# EAGLE board LEDController-REV2-PCB (EAGLE 9.7.0), part 1 of 2
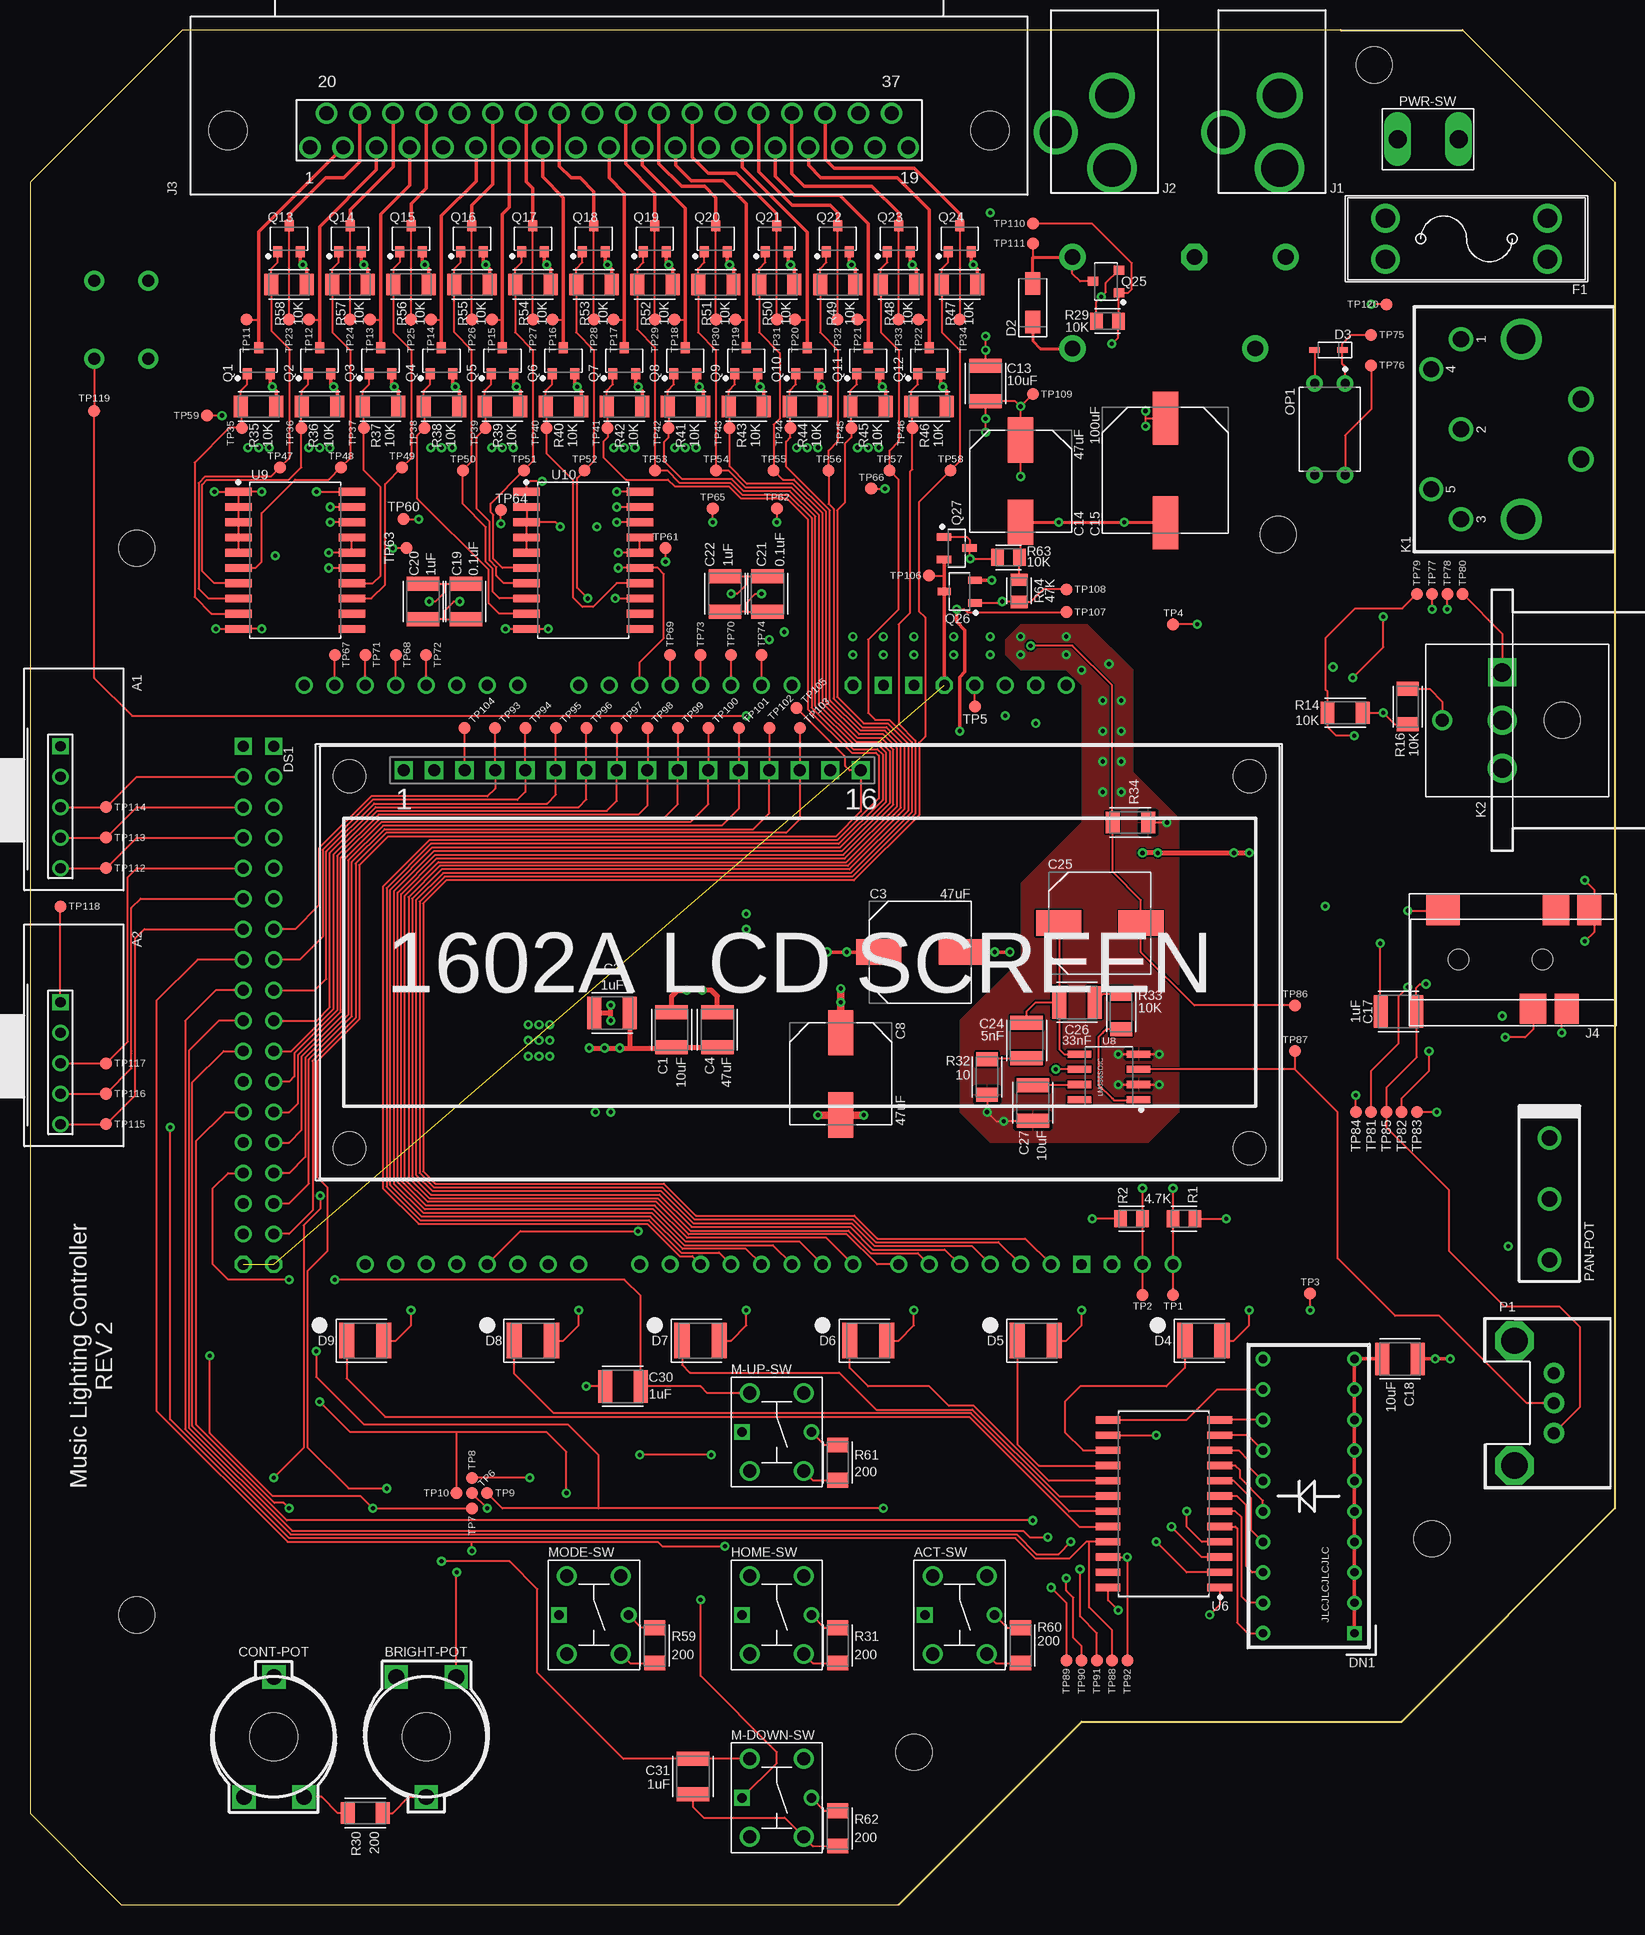
[diagram p0: board, top side]
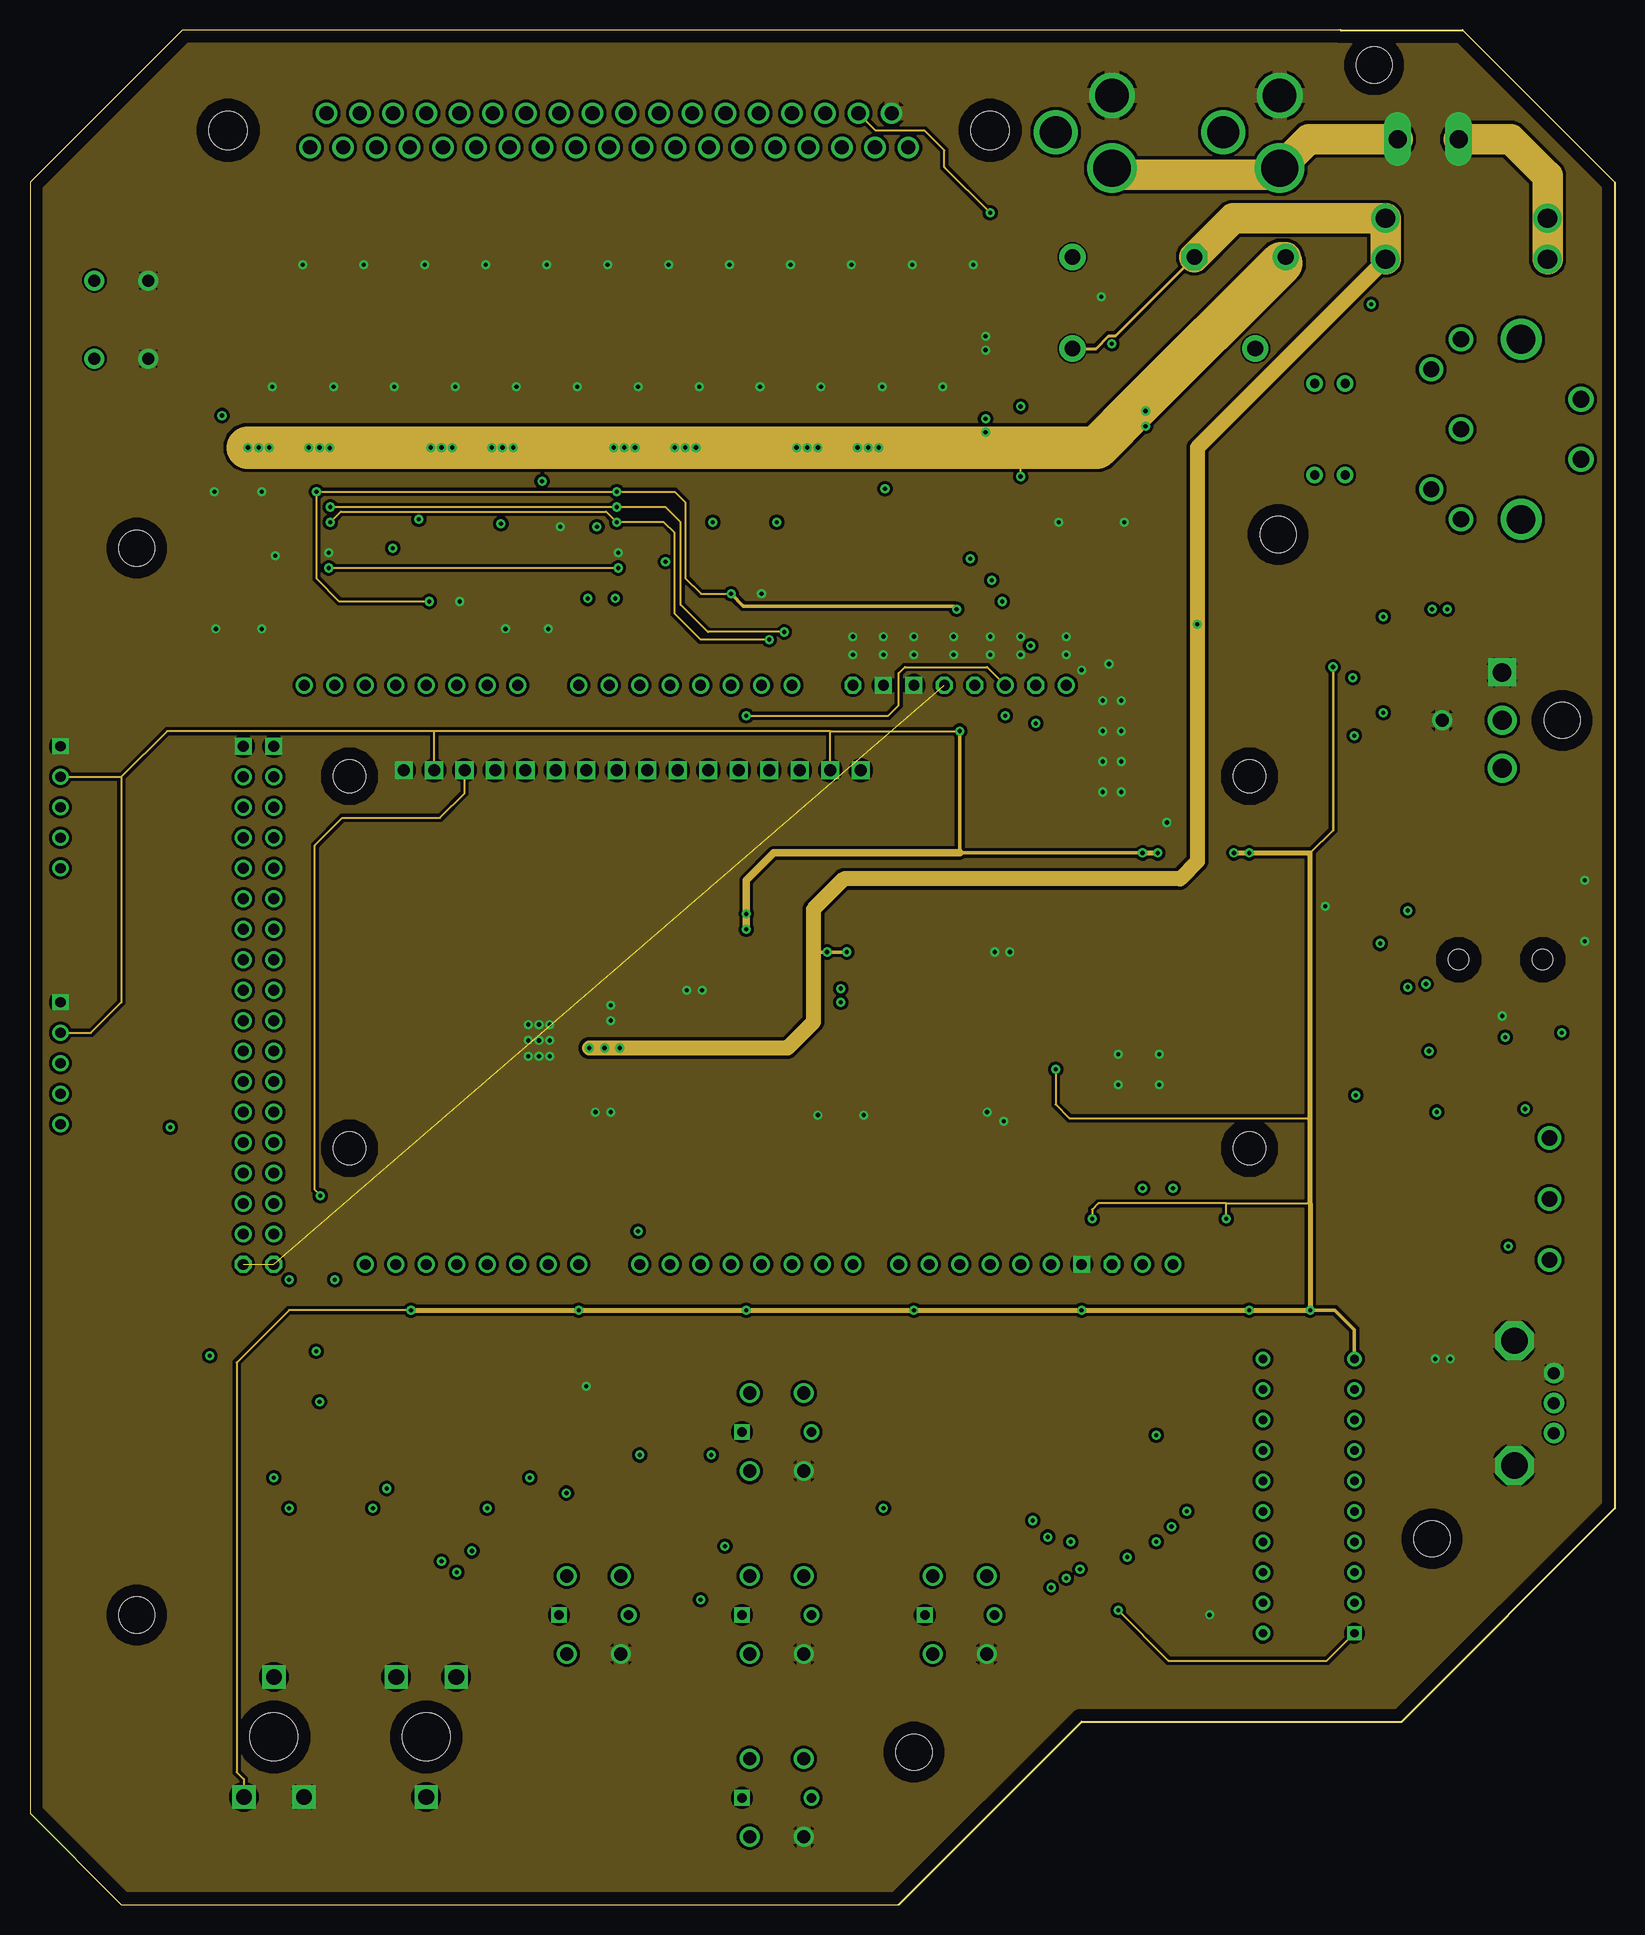
[diagram p1: board, inner layer PWR-PLANE]
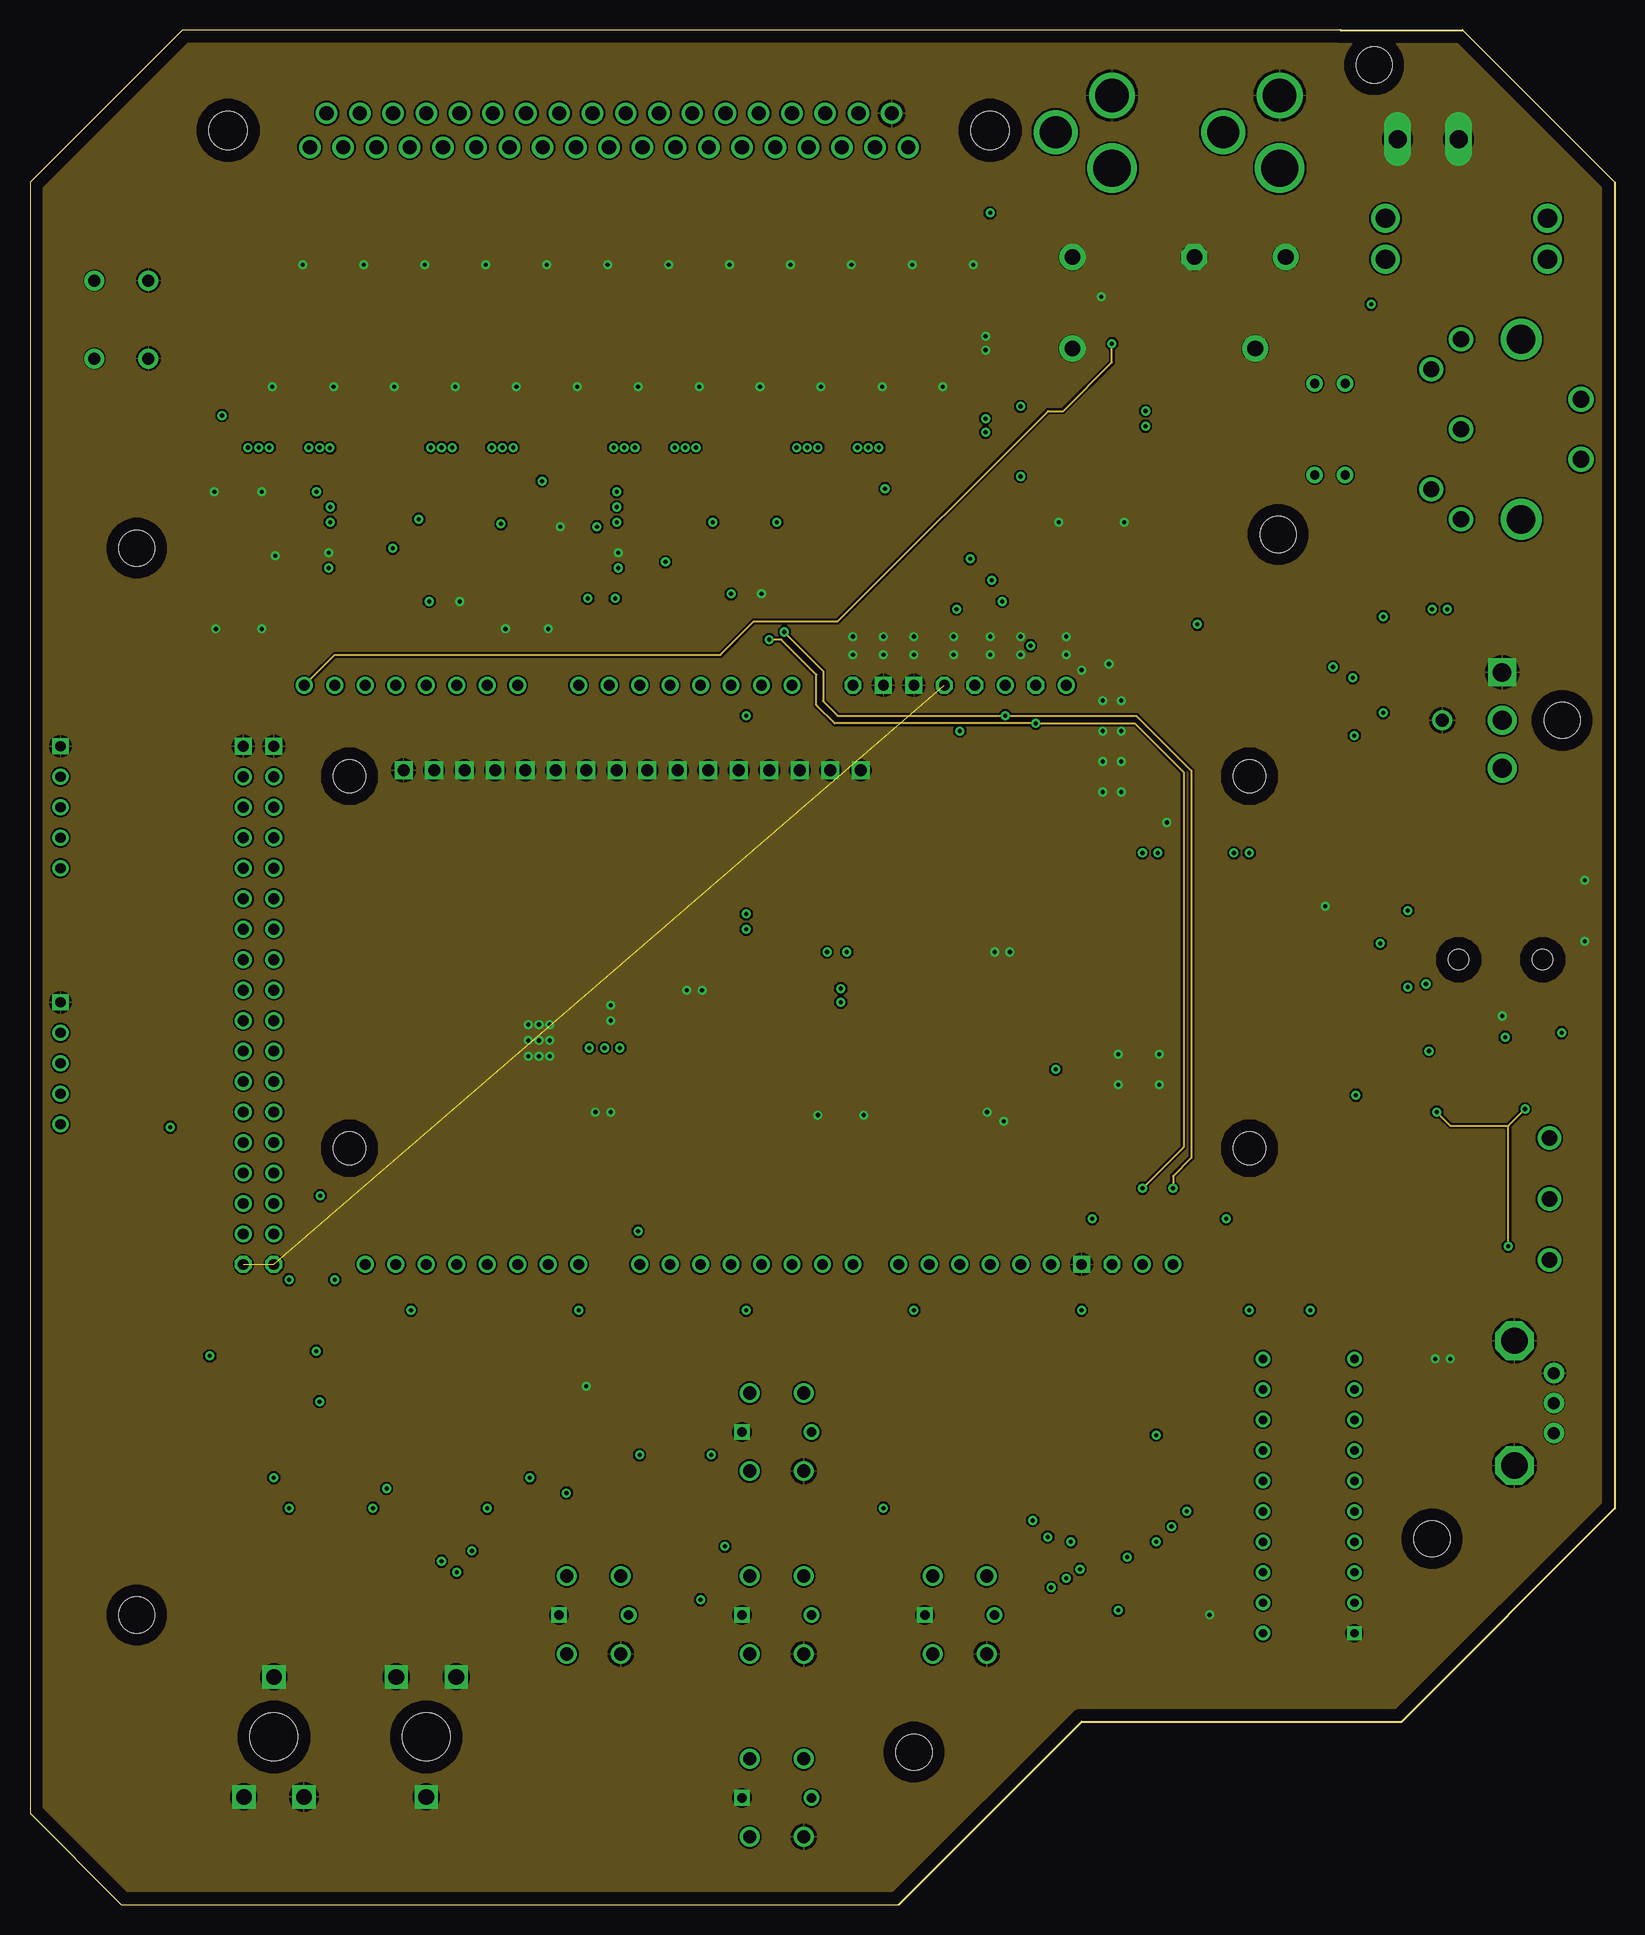
[diagram p2: board, inner layer GND-PLANE]
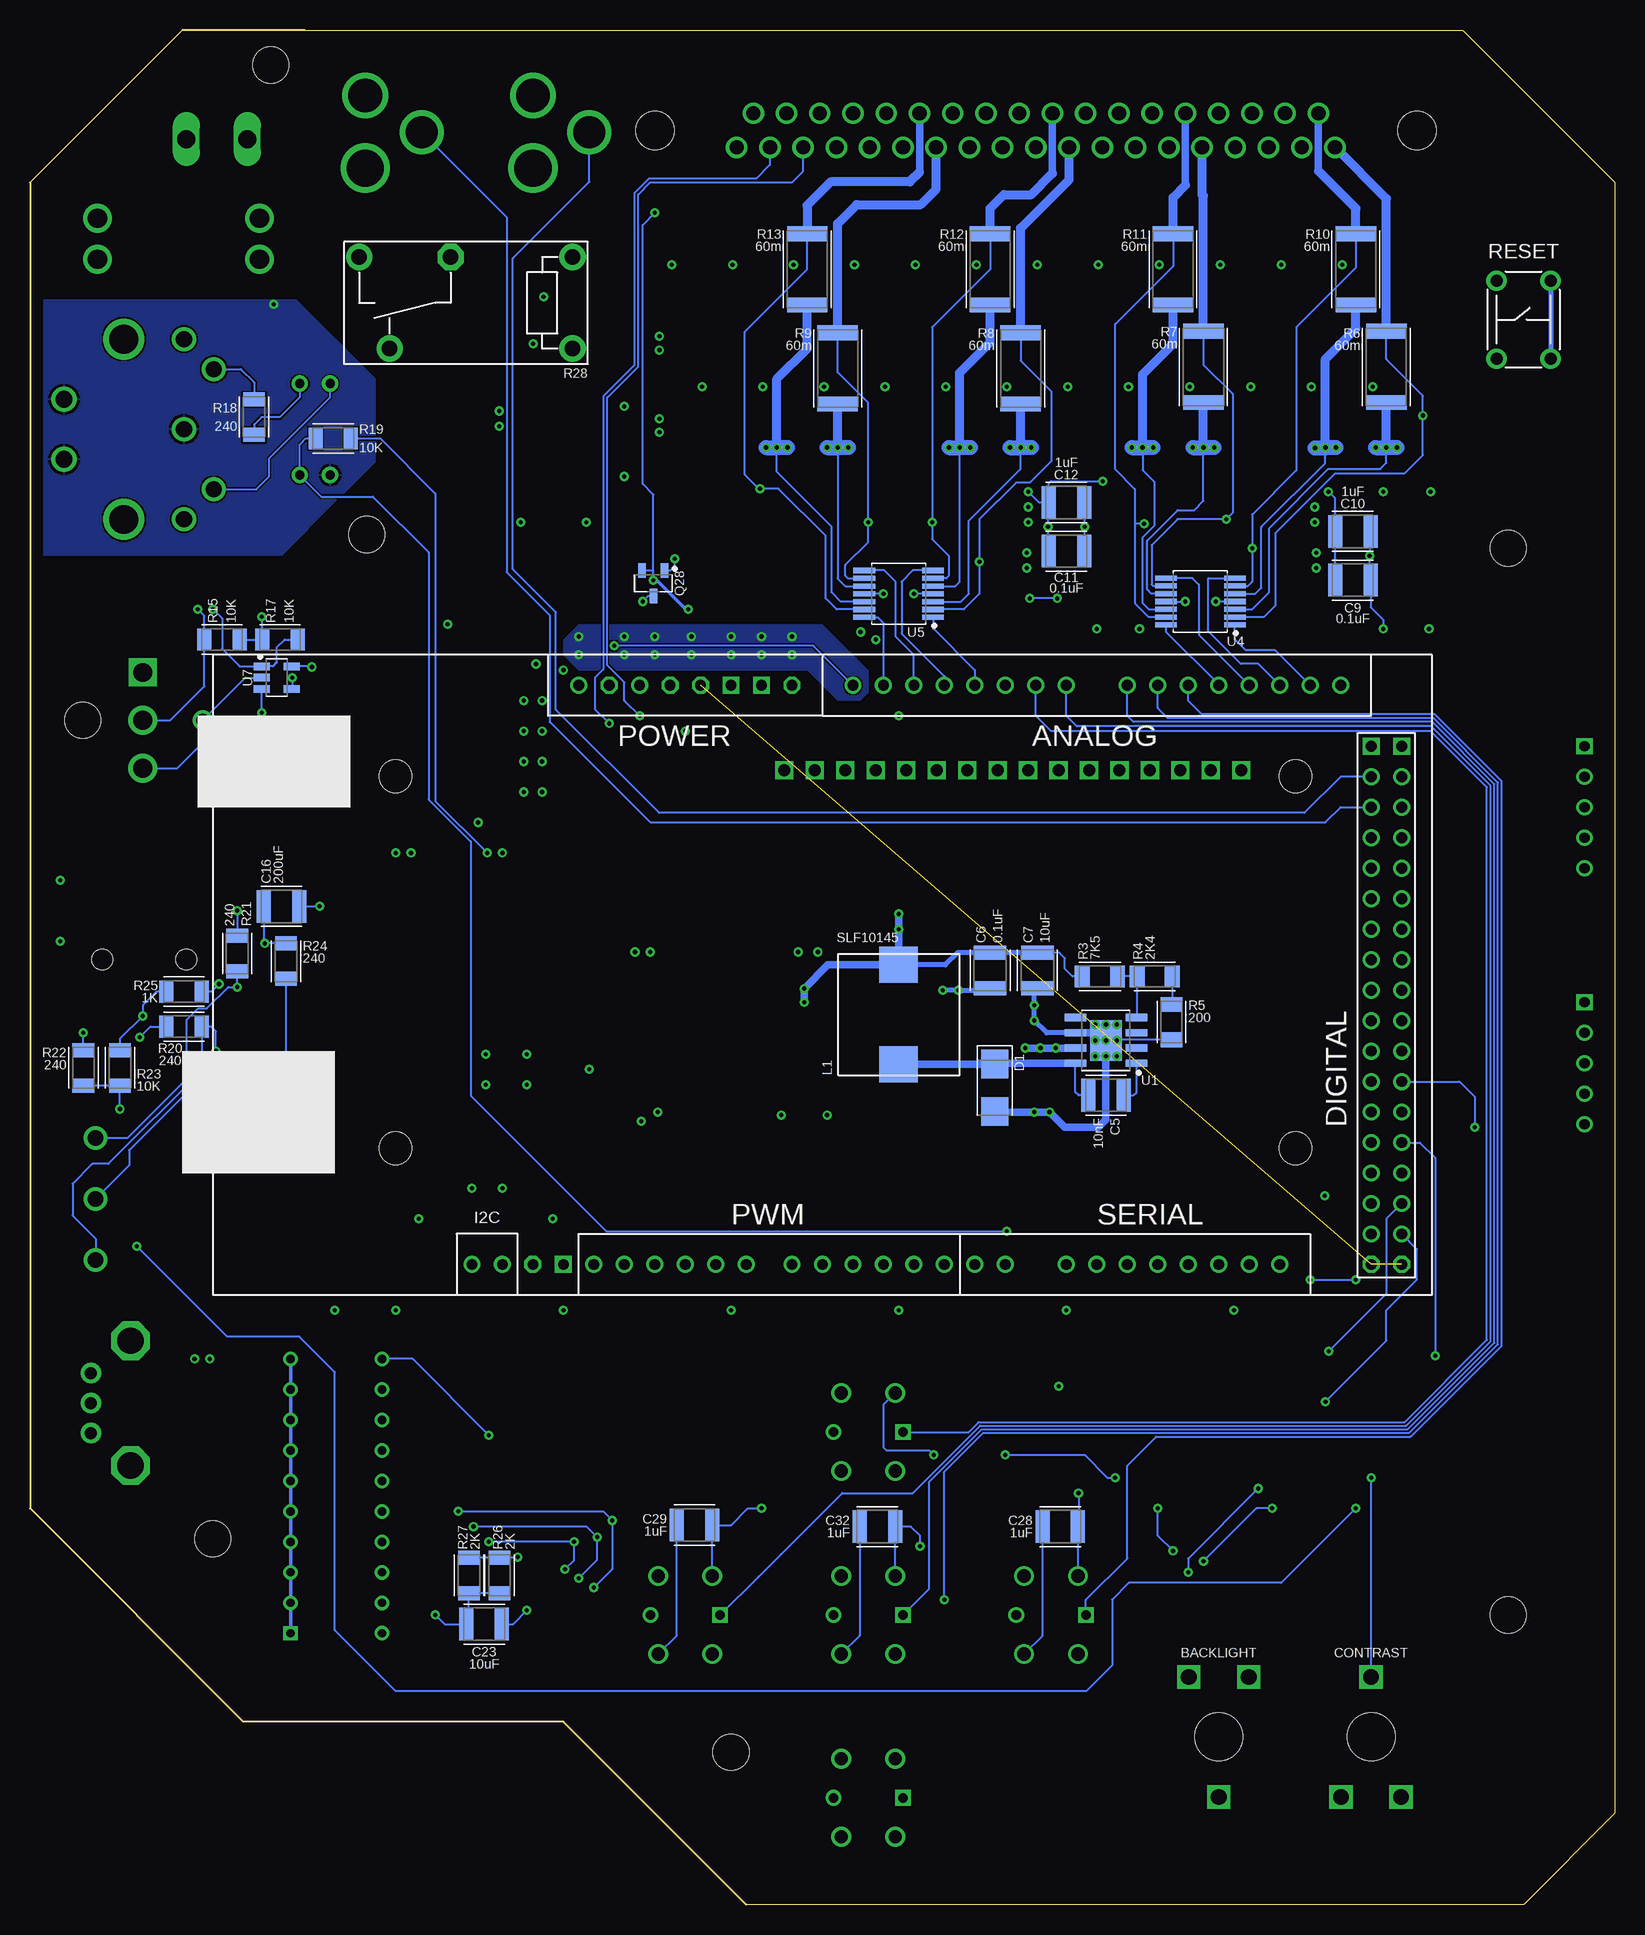
[diagram p3: board, bottom side, seen from below]

Size 132.08 x 156.21 mm. Coordinates in mm from the lower left corner, seen from the top.
Outline: 87.63,15.24 72.39,0 7.62,0 0,7.62 0,143.51 12.7,156.21 109.22,156.21 119.38,156.21 132.08,143.51 132.08,33.02 114.3,15.24 87.63,15.24
Copper layers (1+2*15+16): Top 0.035mm / dielectric 1.5mm / PWR-PLANE 0.035mm / dielectric 0.15mm / GND-PLANE 0.035mm / dielectric 0.2mm / Bottom 0.035mm
Design rules "default *": minimum track width 6mil, minimum drill 0.35mm, track to track 6mil, track to pad 6mil, pad to pad 6mil, via to via 6mil, smd to smd 6mil, copper to edge 40mil, drill to drill 6mil, minimum pad ring 10mil, minimum via ring 8mil, stop-mask expansion 4mil, vias tented up to drill 0mil, thermal gap 10mil
Holes 3 mm at 116.84,30.48 112.01,153.29 8.89,113.03 8.89,24.13 73.66,12.7 104.01,114.17

## Footprints (pad centres in the part's own frame; a part is rotated, then mirrored left to right if it is on the bottom)
PEC11R-DB = drill 0.85 square: P$1 0,0 | drill 0.85: P$2 2.54,0; P$3 5.08,0; P$4 7.62,0; P$5 10.16,0
ILS-TB = drill 1.1: P$1 -2.25,3.25; P$2 2.25,3.25; P$3 -2.25,-3.25; P$4 2.25,-3.25 | drill 0.8 square: P$5 -2.9,0 | drill 0.8: P$6 2.9,0
PT10LV10 = drill 1.3 square: P1 -2.5,-5; P2 0,5; P3 2.5,-5 | hole 4: 0,0
CAPC3225X135 = smd 1.165 x 2.715: 1 -1.475,0; 2 1.475,0
CAPAE830X1050N = smd 3.764 x 2.115: 1 -3.426,0; 2 3.426,0
CAPAE1030X1050N = smd 4.416 x 2.115: 1 -4.353,0; 2 4.353,0
DIOM4326X250 = smd 2.37 x 2.23: A 1.985,0; C -1.985,0
SS14-CHAN = smd 1.849 x 1.232: A 1.602,0; C -1.602,0
SOD2412X120N = smd 0.89 x 0.437: A 1.171,0; C -1.171,0
LEDC3528X190N = smd 1.264 x 2.954: A 1.545,0; C -1.545,0
LTA-1000HR = drill 0.7 square: A1 -3.81,11.43 | drill 0.7: A2 -3.81,8.89; A3 -3.81,6.35; A4 -3.81,3.81; A5 -3.81,1.27; A6 -3.81,-1.27; A7 -3.81,-3.81; A8 -3.81,-6.35; A9 -3.81,-8.89; A10 -3.81,-11.43; K11 3.81,-11.43; K12 3.81,-8.89; K13 3.81,-6.35; K14 3.81,-3.81; K15 3.81,-1.27; K16 3.81,1.27; K17 3.81,3.81; K18 3.81,6.35; K19 3.81,8.89; K20 3.81,11.43
1602A-LCD = drill 1 square: D1 2,7; D2 2,9.54; D3 2,12.08; D4 2,14.62; D5 2,17.16; D6 2,19.7; D7 2,22.24; D8 2,24.78; D9 2,27.32; D10 2,29.86; D11 2,32.4; D12 2,34.94; D13 2,37.48; D14 2,40.02; D15 2,42.56; D16 2,45.1 | hole 2.7: 2.5,77.5; 2.5,2.5; 33.5,77.5; 33.5,2.5
3557-10 = drill 1.6: P1 -6.75,1.7; P2 -6.75,-1.7; P3 6.75,1.7; P4 6.75,-1.7
KLDX-0202-A-HZ-BJACK = drill 3.1: P$1 0,-3 | drill 2.8: P$2 0,3.05 | drill 2.65: P$3 -4.7,0
D-SUB-37 = drill 1.19: P1 0,24.93; P2 0,22.16; P3 0,19.39; P4 0,16.62; P5 0,13.85; P6 0,11.08; P7 0,8.31; P8 0,5.54; P9 0,2.77; P10 0,0; P11 0,-2.77; P12 0,-5.54; P13 0,-8.31; P14 0,-11.08; P15 0,-13.85; P16 0,-16.62; P17 0,-19.39; P18 0,-22.16; P19 0,-24.93; P20 2.84,23.545; P21 2.84,20.775; P22 2.84,18.005; P23 2.84,15.235; P24 2.84,12.465; P25 2.84,9.695; P26 2.84,6.925; P27 2.84,4.155; P28 2.84,1.385; P29 2.84,-1.385; P30 2.84,-4.155; P31 2.84,-6.925; P32 2.84,-9.695; P33 2.84,-12.465; P34 2.84,-15.235; P35 2.84,-18.005; P36 2.84,-20.775; P37 2.84,-23.545 | hole 3.2: 1.42,31.75; 1.42,-31.75
SJ-43515RS-SMT-TR = smd 2 x 2.5: P1 0.6,-4.1; P6 2.5,4.1 | smd 2.8 x 2.5: P2 12.8,-4.1 | smd 2.2 x 2.5: P3 5.3,4.1; P4 3.4,-4.1 | hole 1.7: 4.5,0; 11.5,0
57PC5FS = drill 1.4: G1 2.5,10; G2 -2.5,10 | drill 2.39: M1 7.505,5.01; M2 -7.505,5.01 | drill 1.35: P1 -7.505,0; P2 0,0; P3 7.505,0; P4 -5.005,-2.49; P5 5.005,-2.49
E3FRA-XLR-F = drill 1.1: GND 0,-5 | drill 1.55 square: P1 -4,0 | drill 1.6: P2 4,0; P3 0,0 | hole 3: 0,5
SLF10145 = smd 3 x 3.2: P$1 -4.136,0; P$2 4.136,0
DIP762W51P254L458H450Q4B = drill 0.772 pad 1.373: 1 -3.81,1.27; 2 -3.81,-1.27; 3 3.81,-1.27; 4 3.81,1.27
PTV09A-2020F = drill 2.2 octagon: M1 0,5.2; M2 0,-5.2 | drill 1 pad 1.7: P1 3.3,-2.5; P2 3.3,0; P3 3.3,2.5
CHEAP-POT = drill 1.3: P$1 -5.08,0; P$2 0,0; P$3 5.08,0
PWR-BR-SM = drill 1.5 long: P1 -2.54,0; P2 2.54,0
HS-SOT-23F = smd 0.9 x 0.75: 1 -1.085,0.95; 2 -1.085,-0.95; 3 1.085,0
SOT95P280X120-3N = smd 1.112 x 0.6: 1 -1.28,0.95; 2 -1.28,-0.95; 3 1.28,0
SOT95P237X112-3N = smd 1.224 x 0.625: 1 -1.064,0.95; 2 -1.064,-0.95; 3 1.064,0
RESC2012X65 = smd 1.031 x 1.42: 1 -0.919,0; 2 0.919,0
RESC3216X70N = smd 1.231 x 1.772: 1 -1.466,0; 2 1.466,0
RESC6332X71 = smd 1.231 x 3.37: 1 -2.97,0; 2 2.97,0
RESC3216X70 = smd 1.165 x 1.815: 1 -1.475,0; 2 1.475,0
ALQ112 = drill 1.3 pad 2.184: C1 -10.16,3.81; C2 -10.16,-3.81; NC 5.08,3.81; NO 7.62,-3.81 | drill 1.3 pad 2.184 octagon: COM 0,-3.81
B3F-10-SERIES = drill 1 pad 1.676: 1 -3.25,2.25; 2 3.25,2.25; 3 -3.25,-2.25; 4 3.25,-2.25
TP10R = smd 1 x 1: TP 0,0
SOIC127P600X170-9T271X340N = smd 1.8 x 0.602: 1 -2.55,1.905; 2 -2.55,0.635; 3 -2.55,-0.635; 4 -2.55,-1.905; 5 2.55,-1.905; 6 2.55,-0.635; 7 2.55,0.635; 8 2.55,1.905 | smd 2.62 x 3.4: 9 0,0
HS-TSSOP-14 = smd 1.8 x 0.425: 1 -2.872,1.95; 2 -2.872,1.3; 3 -2.872,0.65; 4 -2.872,0; 5 -2.872,-0.65; 6 -2.872,-1.3; 7 -2.872,-1.95; 8 2.872,-1.95; 9 2.872,-1.3; 10 2.872,-0.65; 11 2.872,0; 12 2.872,0.65; 13 2.872,1.3; 14 2.872,1.95
SOIC127P1032X265-24N = smd 2.053 x 0.605: 1 -4.654,6.985; 2 -4.654,5.715; 3 -4.654,4.445; 4 -4.654,3.175; 5 -4.654,1.905; 6 -4.654,0.635; 7 -4.654,-0.635; 8 -4.654,-1.905; 9 -4.654,-3.175; 10 -4.654,-4.445; 11 -4.654,-5.715; 12 -4.654,-6.985; 13 4.654,-6.985; 14 4.654,-5.715; 15 4.654,-4.445; 16 4.654,-3.175; 17 4.654,-1.905; 18 4.654,-0.635; 19 4.654,0.635; 20 4.654,1.905; 21 4.654,3.175; 22 4.654,4.445; 23 4.654,5.715; 24 4.654,6.985
SOT95P280X145-5N = smd 1.34 x 0.62: 1 -1.253,0.95; 2 -1.253,0; 3 -1.253,-0.95; 4 1.253,-0.95; 5 1.253,0.95
SOIC127P599X175-8N = smd 1.968 x 0.602: 1 -2.47,1.905; 2 -2.47,0.635; 3 -2.47,-0.635; 4 -2.47,-1.905; 5 2.47,-1.905; 6 2.47,-0.635; 7 2.47,0.635; 8 2.47,1.905
SO20-127P1032X265-20N-HS = smd 2.2 x 0.65: 1 -4.722,5.715; 2 -4.722,4.445; 3 -4.722,3.175; 4 -4.722,1.905; 5 -4.722,0.635; 6 -4.722,-0.635; 7 -4.722,-1.905; 8 -4.722,-3.175; 9 -4.722,-4.445; 10 -4.722,-5.715; 11 4.722,-5.715; 12 4.722,-4.445; 13 4.722,-3.175; 14 4.722,-1.905; 15 4.722,-0.635; 16 4.722,0.635; 17 4.722,1.905; 18 4.722,3.175; 19 4.722,4.445; 20 4.722,5.715
ARDUINO-MEGA-2560 = drill 0.9: 0 -25.4,-12.7; 1 -25.4,-10.16; 2 -25.4,-7.62; 3 -25.4,-5.08; 4 -25.4,-2.54; 5 -25.4,0; 6 -25.4,2.54; 7 -25.4,5.08; 8 -25.4,8.89; 9 -25.4,11.43; 10 -25.4,13.97; 11 -25.4,16.51; 12 -25.4,19.05; 13 -25.4,21.59; 14 -25.4,-17.78; 15 -25.4,-20.32; 16 -25.4,-22.86; 17 -25.4,-25.4; 18 -25.4,-27.94; 19 -25.4,-30.48; 20 -25.4,-33.02; 21 -25.4,-35.56; 22 -22.86,-43.18; 23 -22.86,-45.72; 24 -20.32,-43.18; 25 -20.32,-45.72; 26 -17.78,-43.18; 27 -17.78,-45.72; 28 -15.24,-43.18; 29 -15.24,-45.72; 30 -12.7,-43.18; 31 -12.7,-45.72; 32 -10.16,-43.18; 33 -10.16,-45.72; 34 -7.62,-43.18; 35 -7.62,-45.72; 36 -5.08,-43.18; 37 -5.08,-45.72; 38 -2.54,-43.18; 39 -2.54,-45.72; 40 0,-43.18; 41 0,-45.72; 42 2.54,-43.18; 43 2.54,-45.72; 44 5.08,-43.18; 45 5.08,-45.72; 46 7.62,-43.18; 47 7.62,-45.72; 48 10.16,-43.18; 49 10.16,-45.72; 50 12.7,-43.18; 51 12.7,-45.72; 52 15.24,-43.18; 53 15.24,-45.72; 54 22.86,0; 55 22.86,-2.54; 56 22.86,-5.08; 57 22.86,-7.62; 58 22.86,-10.16; 59 22.86,-12.7; 60 22.86,-15.24; 61 22.86,-17.78; 62 22.86,-22.86; 63 22.86,-25.4; 64 22.86,-27.94; 65 22.86,-30.48; 66 22.86,-33.02; 67 22.86,-35.56; 68 22.86,-38.1; 69 22.86,-40.64; NC 22.86,22.86; RST 22.86,17.78; SCLK -25.4,31.75; SDA -25.4,29.21 | drill 0.9 octagon: 3.3V 22.86,15.24; 5V 22.86,12.7; 5VD1 -25.4,-45.72; 5VD2 -25.4,-43.18; AREF -25.4,26.67; IOREF 22.86,20.32; VIN 22.86,5.08 | drill 0.9 square: DGND0 17.78,-45.72; DGND1 17.78,-43.18; GND0 -25.4,24.13; GND1 22.86,10.16; GND2 22.86,7.62

## Placement (x,y rotation side)
A1  PEC11R-DB  [PEC11R-DB]  2.54,96.52 270 top
A2  PEC11R-DB  [PEC11R-DB]  2.54,75.18 270 top
ACT-SW  ILS-TB180-60  [ILS-TB]  77.47,24.13 0 top
BRIGHT-POT  PT10LV10_TPOT  [PT10LV10]  33.02,13.97 180 top
C1  10uF  [CAPC3225X135]  53.47,72.9 90 top
C2  1uF  [CAPC3225X135]  48.51,74.29 180 top
C3  47uF  [CAPAE830X1050N]  74.17,79.38 0 top
C4  47uF  [CAPC3225X135]  57.28,72.9 90 top
C5  10nF  [CAPC3225X135]  42.42,67.44 180 bottom
C6  0.1uF  [CAPC3225X135]  52.07,77.85 270 bottom
C7  10uF  [CAPC3225X135]  48.13,77.85 270 bottom
C8  47uF  [CAPAE830X1050N]  67.56,69.21 270 top
C9  0.1uF  [CAPC3225X135]  21.84,110.36 0 bottom
C10  1uF  [CAPC3225X135]  21.84,114.43 0 bottom
C11  0.1uF  [CAPC3225X135]  45.72,112.78 0 bottom
C12  1uF  [CAPC3225X135]  45.72,116.84 0 bottom
C13  10uF  [CAPC3225X135]  79.63,126.75 90 top
C14  47uF  [CAPAE830X1050N]  82.55,118.62 270 top
C15  100uF  [CAPAE1030X1050N]  94.61,119.51 270 top
C16  200uF  [CAPC3225X135]  111.12,83.18 0 bottom
C17  1uF  [CAPC3225X135]  114.05,74.42 0 top
C18  10uF  [CAPC3225X135]  114.17,45.47 0 top
C19  0.1uF  [CAPC3225X135]  36.32,108.58 270 top
C20  1uF  [CAPC3225X135]  32.77,108.58 270 top
C21  0.1uF  [CAPC3225X135]  61.47,109.22 270 top
C22  1uF  [CAPC3225X135]  57.91,109.22 270 top
C23  10uF  [CAPC3225X135]  94.23,23.37 180 bottom
C24  5nF  [CAPC3225X135]  83.06,72.01 270 top
C25  220uF  [CAPAE830X1050N]  89.15,81.79 0 top
C26  33nF  [CAPC3225X135]  87.25,75.18 0 top
C27  10uF  [CAPC3225X135]  83.57,66.8 270 top
C28  1uF  [CAPC3225X135]  46.23,31.5 0 bottom
C29  1uF  [CAPC3225X135]  76.71,31.62 0 bottom
C30  1uF  [CAPC3225X135]  49.4,43.18 0 top
C31  1uF  [CAPC3225X135]  55.24,10.67 90 top
C32  1uF  [CAPC3225X135]  61.47,31.5 0 bottom
CONT-POT  PT10LV10_TPOT  [PT10LV10]  20.32,13.97 0 top
D1  ES2A/A  [DIOM4326X250]  51.69,68.07 270 bottom
D2  SS14-CHAN  [SS14-CHAN]  83.57,133.48 90 top
D3  1N4448WS  [SOD2412X120N]  108.2,129.54 180 top
D4  2PLCC-LED  [LEDC3528X190N]  97.79,46.99 0 top
D5  2PLCC-LED  [LEDC3528X190N]  83.82,46.99 0 top
D6  2PLCC-LED  [LEDC3528X190N]  69.85,46.99 0 top
D7  2PLCC-LED  [LEDC3528X190N]  55.88,46.99 0 top
D8  2PLCC-LED  [LEDC3528X190N]  41.91,46.99 0 top
D9  2PLCC-LED  [LEDC3528X190N]  27.94,46.99 0 top
DN1  LTA-1000HR  [LTA-1000HR]  106.55,34.04 180 top
DS1  1602A-LCD  [1602A-LCD]  24.13,96.52 270 top
F1  3557-10  [3557-10]  119.71,138.81 180 top
HOME-SW  ILS-TB180-60  [ILS-TB]  62.23,24.13 0 top
J1  KLDX-0202-A-BJACK  [KLDX-0202-A-HZ-BJACK]  104.14,147.7 0 top
J2  KLDX-0202-A-BJACK  [KLDX-0202-A-HZ-BJACK]  90.17,147.7 0 top
J3  D-SUB-37  [D-SUB-37]  48.26,146.43 90 top
J4  SJ-43515RS-SMT-TR  [SJ-43515RS-SMT-TR]  130.56,78.74 180 top
K1  DIN-5  [57PC5FS]  119.25,122.94 270 top
K2  E3FRAQG-XLR-FEMALE  [E3FRA-XLR-F]  122.68,98.68 270 top
L1  SLF10145  [SLF10145]  59.69,74.17 90 bottom
M-DOWN-SW  ILS-TB180-60  [ILS-TB]  62.23,8.89 0 top
M-UP-SW  ILS-TB180-60  [ILS-TB]  62.23,39.37 0 top
MODE-SW  ILS-TB180-60  [ILS-TB]  46.99,24.13 0 top
OP1  PC817  [DIP762W51P254L458H450Q4B]  108.33,122.94 270 top
P1  PTV09A-2020F-A103  [PTV09A-2020F]  123.7,41.78 0 top
PAN-POT  CHEAP-POT  [CHEAP-POT]  126.62,58.8 270 top
PWR-SW  PWR-BREAKOUTSMALL  [PWR-BR-SM]  116.51,147.11 0 top
Q1  SSM3K361R-LFHS-SOT-23F  [HS-SOT-23F]  19.05,128.65 90 top
Q2  SSM3K361R-LFHS-SOT-23F  [HS-SOT-23F]  24.13,128.65 90 top
Q3  SSM3K361R-LFHS-SOT-23F  [HS-SOT-23F]  29.21,128.65 90 top
Q4  SSM3K361R-LFHS-SOT-23F  [HS-SOT-23F]  34.29,128.65 90 top
Q5  SSM3K361R-LFHS-SOT-23F  [HS-SOT-23F]  39.37,128.65 90 top
Q6  SSM3K361R-LFHS-SOT-23F  [HS-SOT-23F]  44.45,128.65 90 top
Q7  SSM3K361R-LFHS-SOT-23F  [HS-SOT-23F]  49.53,128.65 90 top
Q8  SSM3K361R-LFHS-SOT-23F  [HS-SOT-23F]  54.61,128.65 90 top
Q9  SSM3K361R-LFHS-SOT-23F  [HS-SOT-23F]  59.69,128.65 90 top
Q10  SSM3K361R-LFHS-SOT-23F  [HS-SOT-23F]  64.77,128.65 90 top
Q11  SSM3K361R-LFHS-SOT-23F  [HS-SOT-23F]  69.85,128.65 90 top
Q12  SSM3K361R-LFHS-SOT-23F  [HS-SOT-23F]  74.93,128.65 90 top
Q13  SSM3K361R-LFHS-SOT-23F  [HS-SOT-23F]  21.59,138.81 90 top
Q14  SSM3K361R-LFHS-SOT-23F  [HS-SOT-23F]  26.67,138.81 90 top
Q15  SSM3K361R-LFHS-SOT-23F  [HS-SOT-23F]  31.75,138.81 90 top
Q16  SSM3K361R-LFHS-SOT-23F  [HS-SOT-23F]  36.83,138.81 90 top
Q17  SSM3K361R-LFHS-SOT-23F  [HS-SOT-23F]  41.91,138.81 90 top
Q18  SSM3K361R-LFHS-SOT-23F  [HS-SOT-23F]  46.99,138.81 90 top
Q19  SSM3K361R-LFHS-SOT-23F  [HS-SOT-23F]  52.07,138.81 90 top
Q20  SSM3K361R-LFHS-SOT-23F  [HS-SOT-23F]  57.15,138.81 90 top
Q21  SSM3K361R-LFHS-SOT-23F  [HS-SOT-23F]  62.23,138.81 90 top
Q22  SSM3K361R-LFHS-SOT-23F  [HS-SOT-23F]  67.31,138.81 90 top
Q23  SSM3K361R-LFHS-SOT-23F  [HS-SOT-23F]  72.39,138.81 90 top
Q24  SSM3K361R-LFHS-SOT-23F  [HS-SOT-23F]  77.47,138.81 90 top
Q25  SSM3K361R-LFHS-SOT-23F  [HS-SOT-23F]  89.66,135.25 180 top
Q26  CPH3348-TL-W  [SOT95P280X120-3N]  77.47,109.41 180 top
Q27  PNP  [SOT95P237X112-3N]  77.24,113.03 0 top
Q28  PNP  [SOT95P237X112-3N]  80.14,110.11 270 bottom
R1  4.7K  [RESC2012X65]  96.16,57.15 0 top
R2  4.7K  [RESC2012X65]  91.8,57.15 180 top
R3  7K5  [RESC3216X70N]  42.93,77.34 180 bottom
R4  2K4  [RESC3216X70N]  38.35,77.34 0 bottom
R5  200  [RESC3216X70N]  36.96,73.53 270 bottom
R6  60m  [RESC6332X71]  19.05,128.14 90 bottom
R7  60m  [RESC6332X71]  34.29,128.14 90 bottom
R8  60m  [RESC6332X71]  49.53,128.02 90 bottom
R9  60m  [RESC6332X71]  64.77,128.02 90 bottom
R10  60m  [RESC6332X71]  21.59,136.27 90 bottom
R11  60m  [RESC6332X71]  36.83,136.27 90 bottom
R12  60m  [RESC6332X71]  52.07,136.27 90 bottom
R13  60m  [RESC6332X71]  67.31,136.27 90 bottom
R14  10K  [RESC3216X70]  109.6,99.31 180 top
R15  10K  [RESC3216X70]  116.08,105.41 180 bottom
R16  10K  [RESC3216X70]  114.81,99.82 90 top
R17  10K  [RESC3216X70]  111.25,105.41 0 bottom
R18  240  [RESC3216X70]  113.41,123.95 270 bottom
R19  10K  [RESC3216X70]  106.81,122.17 0 bottom
R20  240  [RESC3216X70]  119.25,73.15 0 bottom
R21  240  [RESC3216X70]  114.81,79.25 270 bottom
R22  240  [RESC3216X70]  127.64,69.72 270 bottom
R23  10K  [RESC3216X70]  124.59,69.72 90 bottom
R24  240  [RESC3216X70]  110.74,78.61 90 bottom
R25  1K  [RESC3216X70]  119.25,76.07 0 bottom
R26  2K  [RESC3216X70]  92.96,27.43 90 bottom
R27  2K  [RESC3216X70]  95.5,27.43 90 bottom
R28  ALQ112  [ALQ112]  97.03,133.48 180 bottom
R29  10K  [RESC2012X65]  89.79,131.95 0 top
R30  200  [RESC3216X70]  27.94,7.62 0 top
R31  200  [RESC3216X70N]  67.31,21.59 270 top
R32  10  [RESC3216X70]  79.76,68.96 90 top
R33  10K  [RESC3216X70]  90.93,74.42 90 top
R34  200  [RESC3216X70]  91.69,90.17 180 top
R35  10K  [RESC3216X70]  19.05,124.84 180 top
R36  10K  [RESC3216X70]  24.13,124.84 180 top
R37  10K  [RESC3216X70]  29.21,124.84 180 top
R38  10K  [RESC3216X70]  34.29,124.84 180 top
R39  10K  [RESC3216X70]  39.37,124.84 180 top
R40  10K  [RESC3216X70]  44.45,124.84 180 top
R41  10K  [RESC3216X70]  54.61,124.84 180 top
R42  10K  [RESC3216X70]  49.53,124.84 180 top
R43  10K  [RESC3216X70]  59.69,124.84 180 top
R44  10K  [RESC3216X70]  64.77,124.84 180 top
R45  10K  [RESC3216X70]  69.85,124.84 180 top
R46  10K  [RESC3216X70]  74.93,124.84 180 top
R47  10K  [RESC3216X70]  77.47,135 180 top
R48  10K  [RESC3216X70]  72.39,135 180 top
R49  10K  [RESC3216X70]  67.31,135 180 top
R50  10K  [RESC3216X70]  62.23,135 180 top
R51  10K  [RESC3216X70]  57.15,135 180 top
R52  10K  [RESC3216X70]  52.07,135 180 top
R53  10K  [RESC3216X70]  46.99,135 180 top
R54  10K  [RESC3216X70]  41.91,135 180 top
R55  10K  [RESC3216X70]  36.83,135 180 top
R56  10K  [RESC3216X70]  31.75,135 180 top
R57  10K  [RESC3216X70]  26.67,135 180 top
R58  10K  [RESC3216X70]  21.59,135 180 top
R59  200  [RESC3216X70N]  52.07,21.59 270 top
R60  200  [RESC3216X70N]  82.55,21.59 270 top
R61  200  [RESC3216X70N]  67.31,36.83 270 top
R62  200  [RESC3216X70N]  67.31,6.35 270 top
R63  10K  [RESC2012X65]  81.53,112.27 180 top
R64  47K  [RESC2012X65]  82.42,109.47 270 top
RST-SW  B3F-1000  [B3F-10-SERIES]  7.62,132.08 90 bottom
TP1  TPTP10R  [TP10R]  95.25,50.8 0 top
TP2  TPTP10R  [TP10R]  92.71,50.8 0 top
TP3  TPTP10R  [TP10R]  106.68,50.93 0 top
TP4  TPTP10R  [TP10R]  95.25,106.68 0 top
TP5  TPTP10R  [TP10R]  78.74,99.82 0 top
TP6  TPTP10R  [TP10R]  36.83,34.29 0 top
TP7  TPTP10R  [TP10R]  36.83,33.02 0 top
TP8  TPTP10R  [TP10R]  36.83,35.56 0 top
TP9  TPTP10R  [TP10R]  38.1,34.29 0 top
TP10  TPTP10R  [TP10R]  35.56,34.29 0 top
TP11  TPTP10R  [TP10R]  18.03,132.08 0 top
TP12  TPTP10R  [TP10R]  23.24,132.08 0 top
TP13  TPTP10R  [TP10R]  28.32,132.08 0 top
TP14  TPTP10R  [TP10R]  33.4,132.08 0 top
TP15  TPTP10R  [TP10R]  38.48,132.08 0 top
TP16  TPTP10R  [TP10R]  43.56,132.08 0 top
TP17  TPTP10R  [TP10R]  48.64,132.08 0 top
TP18  TPTP10R  [TP10R]  53.72,132.08 0 top
TP19  TPTP10R  [TP10R]  58.8,132.08 0 top
TP20  TPTP10R  [TP10R]  63.75,132.08 0 top
TP21  TPTP10R  [TP10R]  68.96,132.08 0 top
TP22  TPTP10R  [TP10R]  74.04,132.08 0 top
TP23  TPTP10R  [TP10R]  21.59,132.08 0 top
TP24  TPTP10R  [TP10R]  26.67,132.08 0 top
TP25  TPTP10R  [TP10R]  31.75,132.08 0 top
TP26  TPTP10R  [TP10R]  36.83,132.08 0 top
TP27  TPTP10R  [TP10R]  41.91,132.08 0 top
TP28  TPTP10R  [TP10R]  46.99,132.08 0 top
TP29  TPTP10R  [TP10R]  52.07,132.08 0 top
TP30  TPTP10R  [TP10R]  57.15,132.08 0 top
TP31  TPTP10R  [TP10R]  62.23,132.08 0 top
TP32  TPTP10R  [TP10R]  67.31,132.08 0 top
TP33  TPTP10R  [TP10R]  72.39,132.08 0 top
TP34  TPTP10R  [TP10R]  77.47,132.08 0 top
TP35  TPTP10R  [TP10R]  17.65,123.06 0 top
TP36  TPTP10R  [TP10R]  22.61,123.06 0 top
TP37  TPTP10R  [TP10R]  27.81,123.06 0 top
TP38  TPTP10R  [TP10R]  32.89,123.06 0 top
TP39  TPTP10R  [TP10R]  37.97,123.06 0 top
TP40  TPTP10R  [TP10R]  43.05,123.06 0 top
TP41  TPTP10R  [TP10R]  48.13,123.06 0 top
TP42  TPTP10R  [TP10R]  53.21,123.06 0 top
TP43  TPTP10R  [TP10R]  58.29,123.06 0 top
TP44  TPTP10R  [TP10R]  63.37,123.06 0 top
TP45  TPTP10R  [TP10R]  68.45,123.06 0 top
TP46  TPTP10R  [TP10R]  73.53,123.06 0 top
TP47  TPTP10R  [TP10R]  20.83,119.76 0 top
TP48  TPTP10R  [TP10R]  25.91,119.76 0 top
TP49  TPTP10R  [TP10R]  30.99,119.76 0 top
TP50  TPTP10R  [TP10R]  36.07,119.51 0 top
TP51  TPTP10R  [TP10R]  41.15,119.51 0 top
TP52  TPTP10R  [TP10R]  46.23,119.51 0 top
TP53  TPTP10R  [TP10R]  52.08,119.51 0 top
TP54  TPTP10R  [TP10R]  57.15,119.51 0 top
TP55  TPTP10R  [TP10R]  61.98,119.51 0 top
TP56  TPTP10R  [TP10R]  66.55,119.51 0 top
TP57  TPTP10R  [TP10R]  71.63,119.51 0 top
TP58  TPTP10R  [TP10R]  76.71,119.51 0 top
TP59  TPTP10R  [TP10R]  14.73,124.08 0 top
TP60  TPTP10R  [TP10R]  31.12,115.44 0 top
TP61  TPTP10R  [TP10R]  52.96,113.03 0 top
TP62  TPTP10R  [TP10R]  62.23,116.33 0 top
TP63  TPTP10R  [TP10R]  31.37,113.03 0 top
TP64  TPTP10R  [TP10R]  39.24,116.2 0 top
TP65  TPTP10R  [TP10R]  56.9,116.33 0 top
TP66  TPTP10R  [TP10R]  70.1,117.98 0 top
TP67  TPTP10R  [TP10R]  25.4,104.14 0 top
TP68  TPTP10R  [TP10R]  30.48,104.14 0 top
TP69  TPTP10R  [TP10R]  53.34,104.14 0 top
TP70  TPTP10R  [TP10R]  58.42,104.14 0 top
TP71  TPTP10R  [TP10R]  27.94,104.14 0 top
TP72  TPTP10R  [TP10R]  33.02,104.14 0 top
TP73  TPTP10R  [TP10R]  55.88,104.14 0 top
TP74  TPTP10R  [TP10R]  60.96,104.14 0 top
TP75  TPTP10R  [TP10R]  111.76,130.81 0 top
TP76  TPTP10R  [TP10R]  111.76,128.27 0 top
TP77  TPTP10R  [TP10R]  116.84,109.22 0 top
TP78  TPTP10R  [TP10R]  118.11,109.22 0 top
TP79  TPTP10R  [TP10R]  115.57,109.22 0 top
TP80  TPTP10R  [TP10R]  119.38,109.22 0 top
TP81  TPTP10R  [TP10R]  111.76,66.04 0 top
TP82  TPTP10R  [TP10R]  114.3,66.04 0 top
TP83  TPTP10R  [TP10R]  115.57,66.04 0 top
TP84  TPTP10R  [TP10R]  110.49,66.04 0 top
TP85  TPTP10R  [TP10R]  113.03,66.04 0 top
TP86  TPTP10R  [TP10R]  105.41,74.93 0 top
TP87  TPTP10R  [TP10R]  105.41,71.12 0 top
TP88  TPTP10R  [TP10R]  90.17,20.32 0 top
TP89  TPTP10R  [TP10R]  86.36,20.32 0 top
TP90  TPTP10R  [TP10R]  87.63,20.32 0 top
TP91  TPTP10R  [TP10R]  88.9,20.32 0 top
TP92  TPTP10R  [TP10R]  91.44,20.32 0 top
TP93  TPTP10R  [TP10R]  38.76,98.04 0 top
TP94  TPTP10R  [TP10R]  41.3,98.04 0 top
TP95  TPTP10R  [TP10R]  43.84,98.04 0 top
TP96  TPTP10R  [TP10R]  46.38,98.04 0 top
TP97  TPTP10R  [TP10R]  48.9,98.04 0 top
TP98  TPTP10R  [TP10R]  51.46,98.04 0 top
TP99  TPTP10R  [TP10R]  53.99,98.04 0 top
TP100  TPTP10R  [TP10R]  56.54,98.04 0 top
TP101  TPTP10R  [TP10R]  59.08,98.04 0 top
TP102  TPTP10R  [TP10R]  61.62,98.04 0 top
TP103  TPTP10R  [TP10R]  64.16,98.04 0 top
TP104  TPTP10R  [TP10R]  36.21,98.04 0 top
TP105  TPTP10R  [TP10R]  63.88,99.69 0 top
TP106  TPTP10R  [TP10R]  74.93,110.74 0 top
TP107  TPTP10R  [TP10R]  86.36,107.7 0 top
TP108  TPTP10R  [TP10R]  86.36,109.6 0 top
TP109  TPTP10R  [TP10R]  83.57,125.86 0 top
TP110  TPTP10R  [TP10R]  83.57,140.08 0 top
TP111  TPTP10R  [TP10R]  83.57,138.43 0 top
TP112  TPTP10R  [TP10R]  6.35,86.36 0 top
TP113  TPTP10R  [TP10R]  6.35,88.9 0 top
TP114  TPTP10R  [TP10R]  6.35,91.44 0 top
TP115  TPTP10R  [TP10R]  6.35,65.02 0 top
TP116  TPTP10R  [TP10R]  6.35,67.56 0 top
TP117  TPTP10R  [TP10R]  6.35,70.1 0 top
TP118  TPTP10R  [TP10R]  2.54,83.18 0 top
TP119  TPTP10R  [TP10R]  5.33,124.46 0 top
TP120  TPTP10R  [TP10R]  113.03,133.35 0 top
U1  LM22673  [SOIC127P600X170-9T271X340N]  42.42,72.01 180 bottom
U4  INA4180A4IPWRHS-TSSOP-14  [HS-TSSOP-14]  34.54,108.58 180 bottom
U5  INA4180A4IPWRHS-TSSOP-14  [HS-TSSOP-14]  59.69,109.22 180 bottom
U6  STP16CP05  [SOIC127P1032X265-24N]  94.49,33.4 180 top
U7  TLV9351-OPAMP  [SOT95P280X145-5N]  111.51,102.23 0 bottom
U8  LM386SOIC  [SOIC127P599X175-8N]  89.92,68.96 180 top
U9  PCA9634SO20-HS  [SO20-127P1032X265-20N-HS]  22.1,112.01 0 top
U10  PCA9634SO20-HS  [SO20-127P1032X265-20N-HS]  46.1,112.01 0 top
U$1  ARDUINO-MEGA-2560  [ARDUINO-MEGA-2560]  63.5,78.74 90 bottom

## Library data of the parts
A1 A2 = Parts Library; CATEGORY: Input; DATASHEET: https://www.bourns.com/docs/Product-Datasheets/PEC11R.pdf; SUB-CATEGORY: Rotary-Encoder
ACT-SW HOME-SW M-DOWN-SW M-UP-SW MODE-SW = Button Library; CATEGORY: Input; DATASHEET: https://www.ckswitches.com/media/2865/ils.pdf; SUB-CATEGORY: Switch; SWITCHTYPE: Tactile
BRIGHT-POT CONT-POT = Parts Library; CATEGORY: Potentiometer; DATASHEET: https://www.piher.net/pdf/12-PT10v03.pdf; SUB-CATEGORY: Trimmer
C1-C32 = Capacitor; CATEGORY: Capacitor
D1 = Diode Library; CATEGORY: Diode; DATASHEET: https://www.onsemi.com/pdf/datasheet/es2d-d.pdf; SUB-CATEGORY: Fast-Rectifier
D2 = Diode Library
D3 = Diode Library; CATEGORY: Diode; DATASHEET: https://rocelec.widen.net/view/pdf/tf3dlteblx/FAIR-S-A0000573112-1.pdf?t.download=true&u=5oefqw; SUB-CATEGORY: General
D4-D9 = Parts Library; CATEGORY: LED; SUB-CATEGORY: Indicator
DN1 = Parts Library; CATEGORY: LED; DATASHEET: https://optoelectronics.liteon.com/upload/download/DS-30-92-0810/LTA-1000HR.pdf; SUB-CATEGORY: Bar-Graph
DS1 = Parts Library; CATEGORY: Screen; DATASHEET: https://www.ibselectronics.com/ibsstore/datasheet/LCM1602A.pdf; SUB-CATEGORY: LCD
F1 L1 R3-R5 R31 R59-R62 = Passives Library
J1 J2 = Parts Library; CATEGORY: Connector; DATASHEET: http://www.kycon.com/2013Catalogpage/DC%20Power/KLDX_0202_LT.pdf; SUB-CATEGORY: Power
J3 K1 K2 = Connector Library
J4 = Connector Library; CATEGORY: Connector; CONN-TYPE: Female; DATASHEET: https://www.cuidevices.com/product/resource/sj-4351x-smt.pdf; JACK: 1/8; PINS: 5; SUB-CATEGORY: Audio-Jack
OP1 = Parts Library; CATEGORY: IC; DATASHEET: http://www.socle-tech.com/doc/IC%20Channel%20Product/Optoelectronic%20Components/Photocoupler/PC817X_NSZ9FSeries_SPEC.pdf; SUB-CATEGORY: Isolator
P1 = Button Library; CATEGORY: Input; DATASHEET: https://www.bourns.com/docs/Product-Datasheets/PTV09.pdf; RANGE: 1K; SUB-CATEGORY: Potentiometer
PAN-POT = Parts Library; CATEGORY: Input; SUB-CATEGORY: Potentiometer
PWR-SW Q1-Q25 U4 U5 U8-U10 = Parts Library
Q26 = Parts Library; CATEGORY: MOSFET; DATASHEET: https://rocelec.widen.net/view/pdf/0p2cmbdrr3/ONSM-S-A0001342044-1.pdf?t.download=true&u=5oefqw; GATETYPE: P; SUB-CATEGORY: Signal
Q27 Q28 = Transistor; CATEGORY: Transistor; SUB-CATEGORY: BJT; TYPE: PNP
R1 R2 R6-R27 R29 R30 R32-R58 R63 R64 = Resistor; CATEGORY: Resistor; SUB-CATEGORY: Fixed
R28 = Parts Library; CATEGORY: Relay; SUBCATEGORY: Power
RST-SW = Button Library; CATEGORY: Input; DATASHEET: https://omronfs.omron.com/en_US/ecb/products/pdf/en-b3f.pdf; SUB-CATEGORY: Switch; SWITCHTYPE: Tactile
TP1-TP120 = testpad
U1 = Parts Library; CATEGORY: IC; DATASHEET: https://www.ti.com/lit/ds/symlink/lm22673.pdf?HQS=dis-dk-null-digikeymode-dsf-pf-null-wwe&ts=1643525451948&ref_url=https%253A%252F%252Fwww.ti.com%252Fgeneral%252Fdocs%252Fsuppproductinfo.tsp%253FdistId%253D10%2526gotoUrl%253Dhttps%253A%252F%252Fwww.ti.com%252Flit%252Fgpn%252Flm22673; REGTYPE: Switching; SUB-CATEGORY: Regulator
U6 = Parts Library; CATEGORY: IC; CHANNELS: 16; DATASHEET: https://www.st.com/content/ccc/resource/technical/document/datasheet/f2/92/00/f9/dd/4a/43/22/CD00126634.pdf/files/CD00126634.pdf/jcr:content/translations/en.CD00126634.pdf; SERIAL: Shift-Register; SUB-CATEGORY: Driver
U7 = Parts Library; CATEGORY: IC; CHANNELS: 1; DATASHEET: https://www.ti.com/lit/ds/symlink/tlv9354.pdf?HQS=dis-dk-null-digikeymode-dsf-pf-null-wwe&ts=1643526319646; SUB-CATEGORY: Opamp
U$1 = ArduinoLibrary; ANALOG: 16; CATEGORY: Arduino; DIGITAL: 54; PWM: 12; SUB-CATEGORY: Large

## Nets
3V3: TP5.TP U$1.3.3V
12V: C1.1 C2.1 C3.1 C4.1 D2.C F1.P3 F1.P4 R28.C1 R28.COM TP4.TP U1.7
ACT: ACT-SW.P$1 C29.2 TP9.TP U$1.25
ACT-IND: ACT-SW.P$5 U$1.61
ARD-VCC: Q26.3 Q27.2 TP106.TP U$1.5V U$1.5VD1 U$1.5VD2
BK-K: BRIGHT-POT.P1 DS1.D16 TP105.TP
ENC1-A: A1.P$4 TP113.TP U$1.51
ENC1-B: A1.P$5 TP112.TP U$1.49
ENC1-SW: A1.P$3 TP114.TP U$1.53
ENC2-A: A2.P$4 TP116.TP U$1.45
ENC2-B: A2.P$5 TP115.TP U$1.43
ENC2-SW: A2.P$3 TP117.TP U$1.47
GND: A1.P$1 A2.P$1 ACT-SW.P$4 C1.2 C2.2 C3.2 C4.2 C6.2 C7.2 C8.2 C9.2 C10.2 C11.2 C12.2 C13.2 C14.2 C15.2 C16.2 C18.2 C19.2 C20.2 C21.2 C22.2 C23.2 C27.2 C28.1 C29.1 C30.1 C31.1 C32.1 CONT-POT.P3 D1.A DS1.D1 HOME-SW.P$4 J1.P$2 J2.P$2 J3.P37 J4.P1 K2.GND K2.P1 M-DOWN-SW.P$4 M-UP-SW.P$4 MODE-SW.P$4 P1.M1 P1.M2 P1.P3 Q1.2 Q2.2 Q3.2 Q4.2 Q5.2 Q6.2 Q7.2 Q8.2 Q9.2 Q10.2 Q11.2 Q12.2 Q13.2 Q14.2 Q15.2 Q16.2 Q17.2 Q18.2 Q19.2 Q20.2 Q21.2 Q22.2 Q23.2 Q24.2 Q25.2 R5.2 R16.2 R23.2 R25.1 R26.1 R27.1 R29.1 R30.1 R31.2 R32.1 R34.1 R35.1 R36.1 R37.1 R38.1 R39.1 R40.1 R41.1 R42.1 R43.1 R44.1 R45.1 R46.1 R47.1 R48.1 R49.1 R50.1 R51.1 R52.1 R53.1 R54.1 R55.1 R56.1 R57.1 R58.1 R59.2 R60.2 R61.2 R62.2 R63.1 R64.1 RST-SW.1 RST-SW.2 TP80.TP TP118.TP U1.6 U1.9 U4.11 U5.11 U6.1 U7.2 U8.2 U8.4 U9.1 U9.2 U9.3 U9.4 U9.5 U9.10 U9.16 U9.17 U10.2 U10.3 U10.4 U10.5 U10.10 U10.16 U10.17 U$1.DGND0 U$1.DGND1 U$1.GND0 U$1.GND1 U$1.GND2
HOME: C32.2 HOME-SW.P$1 TP6.TP U$1.41
HOME-IND: HOME-SW.P$5 U$1.62
HP-SW: R22.2 R23.1 TP83.TP U$1.31
LCD-CONT: CONT-POT.P2 DS1.D3 TP104.TP
LCD-D0: DS1.D7 TP96.TP U$1.36
LCD-D1: DS1.D8 TP97.TP U$1.34
LCD-D2: DS1.D9 TP98.TP U$1.32
LCD-D3: DS1.D10 TP99.TP U$1.30
LCD-D4: DS1.D11 TP100.TP U$1.28
LCD-D5: DS1.D12 TP101.TP U$1.26
LCD-D6: DS1.D13 TP102.TP U$1.24
LCD-D7: DS1.D14 TP103.TP U$1.22
LCD-EN: DS1.D6 TP95.TP U$1.38
LCD-PWR-SIG: U$1.48
LCD-RS: DS1.D4 TP93.TP U$1.42
LCD-RW: DS1.D5 TP94.TP U$1.40
LED1-B: J3.P4 Q3.3 TP13.TP
LED1-B-SIG: Q3.1 R37.2 TP37.TP U9.14
LED1-CURR-NEG: J3.P1 R6.2 TP59.TP U4.2
LED1-CURR-OUT: TP67.TP U4.1 U$1.68
LED1-G: J3.P2 Q1.3 TP11.TP
LED1-G-SIG: Q1.1 R35.2 TP35.TP U9.9
LED1-R: J3.P3 Q2.3 TP12.TP
LED1-R-SIG: Q2.1 R36.2 TP36.TP U9.7
LED2-B: J3.P8 Q6.3 TP16.TP
LED2-B-SIG: Q6.1 R40.2 TP40.TP U10.14
LED2-CURR-NEG: J3.P5 R7.2 TP60.TP U4.9
LED2-CURR-OUT: TP68.TP U4.8 U$1.66
LED2-G: J3.P6 Q4.3 TP14.TP
LED2-G-SIG: Q4.1 R38.2 TP38.TP U10.9
LED2-R: J3.P7 Q5.3 TP15.TP
LED2-R-SIG: Q5.1 R39.2 TP39.TP U10.7
LED3-B: J3.P12 Q9.3 TP19.TP
LED3-B-SIG: Q9.1 R43.2 TP43.TP U$1.6
LED3-CURR-NEG: J3.P9 R8.2 TP61.TP U5.2
LED3-CURR-OUT: TP69.TP U5.1 U$1.58
LED3-G: J3.P10 Q7.3 TP17.TP
LED3-G-SIG: Q7.1 R42.2 TP41.TP U$1.2
LED3-R: J3.P11 Q8.3 TP18.TP
LED3-R-SIG: Q8.1 R41.2 TP42.TP U$1.4
LED4-B: J3.P16 Q12.3 TP22.TP
LED4-B-SIG: Q12.1 R46.2 TP46.TP U$1.12
LED4-CURR-NEG: J3.P13 R9.2 TP62.TP U5.9
LED4-CURR-OUT: TP70.TP U5.8 U$1.56
LED4-G: J3.P14 Q10.3 TP20.TP
LED4-G-SIG: Q10.1 R44.2 TP44.TP U$1.8
LED4-R: J3.P15 Q11.3 TP21.TP
LED4-R-SIG: Q11.1 R45.2 TP45.TP U$1.10
LED5-B: J3.P23 Q15.3 TP25.TP
LED5-B-SIG: Q15.1 R56.2 TP49.TP U9.13
LED5-CURR-NEG: J3.P20 R10.2 TP63.TP U4.6
LED5-CURR-OUT: TP71.TP U4.7 U$1.67
LED5-G: J3.P21 Q13.3 TP23.TP
LED5-G-SIG: Q13.1 R58.2 TP47.TP U9.8
LED5-R: J3.P22 Q14.3 TP24.TP
LED5-R-SIG: Q14.1 R57.2 TP48.TP U9.6
LED6-B: J3.P27 Q18.3 TP28.TP
LED6-B-SIG: Q18.1 R53.2 TP52.TP U10.13
LED6-CURR-NEG: J3.P24 R11.2 TP64.TP U4.13
LED6-CURR-OUT: TP72.TP U4.14 U$1.65
LED6-G: J3.P25 Q16.3 TP26.TP
LED6-G-SIG: Q16.1 R55.2 TP50.TP U10.8
LED6-R: J3.P26 Q17.3 TP27.TP
LED6-R-SIG: Q17.1 R54.2 TP51.TP U10.6
LED7-B: J3.P31 Q21.3 TP31.TP
LED7-B-SIG: Q21.1 R50.2 TP55.TP U$1.7
LED7-CURR-NEG: J3.P28 R12.2 TP65.TP U5.6
LED7-CURR-OUT: TP73.TP U5.7 U$1.57
LED7-G: J3.P29 Q19.3 TP29.TP
LED7-G-SIG: Q19.1 R52.2 TP53.TP U$1.3
LED7-R: J3.P30 Q20.3 TP30.TP
LED7-R-SIG: Q20.1 R51.2 TP54.TP U$1.5
LED8-B: J3.P35 Q24.3 TP34.TP
LED8-B-SIG: Q24.1 R47.2 TP58.TP U$1.13
LED8-CURR-NEG: J3.P32 R13.2 TP66.TP U5.13
LED8-CURR-OUT: TP74.TP U5.14 U$1.55
LED8-G: J3.P33 Q22.3 TP32.TP
LED8-G-SIG: Q22.1 R49.2 TP56.TP U$1.9
LED8-R: J3.P34 Q23.3 TP33.TP
LED8-R-SIG: Q23.1 R48.2 TP57.TP U$1.11
LED-CLK: TP90.TP U6.3 U$1.37
LED-LE: TP89.TP U6.4 U$1.35
LED-OE: TP88.TP U6.21 U$1.33
LED-SDI: TP91.TP U6.2 U$1.39
M-DOWN: C31.2 M-DOWN-SW.P$1 TP7.TP U$1.29
M-DOWN-IND: M-DOWN-SW.P$5 U$1.63
M-UP: C30.2 M-UP-SW.P$1 TP8.TP U$1.27
M-UP-IND: M-UP-SW.P$5 U$1.60
MAIN-RELAY: Q25.1 R29.2 TP110.TP U$1.69
MIDI: OP1.4 R19.1 TP76.TP U$1.17
MIDI-GND: K1.G1 K1.G2 K1.P2 OP1.3 TP120.TP
MODE: C28.2 MODE-SW.P$1 TP10.TP U$1.23
MODE-IND: MODE-SW.P$5 U$1.64
N$1: R4.2 R5.1
N$2: J1.P$1 J2.P$1 PWR-SW.P1
N$3: C5.2 D1.C L1.P$1 U1.8
N$5: C5.1 U1.1
N$6: D3.A K1.P5 OP1.2
N$8: K1.P4 R18.1
N$9: D3.C OP1.1 R18.2 TP75.TP
N$10: K2.P3 R15.2 TP78.TP
N$11: U$1.46
N$13: HOME-SW.P$6 R31.1
N$14: K2.P2 R14.2 TP79.TP
N$15: R14.1 R16.1 U7.3
N$16: R15.1 R17.1 U7.4
N$17: F1.P1 F1.P2 PWR-SW.P2
N$18: U$1.44
N$19: D2.A Q25.3 R28.C2 TP111.TP
N$20: MODE-SW.P$6 R59.1
N$21: J4.P3 R20.1
N$22: PAN-POT.P$2 R24.1 TP84.TP
N$23: C26.2 R33.2
N$24: J4.P6 R22.1
N$25: J4.P2 R21.1
N$26: C16.1 C17.1 R24.2
N$27: DN1.K11 U6.14
N$28: DN1.K12 U6.13
N$29: DN1.K13 U6.12
N$30: J3.P19
N$31: DN1.K14 U6.11
N$32: DN1.K15 U6.10
N$33: DN1.K16 U6.9
N$34: DN1.K17 U6.8
N$35: DN1.K18 U6.7
N$36: DN1.K19 U6.6
N$37: DN1.K20 U6.5
N$38: D4.C U6.15
N$39: D5.C U6.16
N$40: D6.C U6.17
N$41: D7.C U6.18
N$42: D8.C U6.19
N$43: D9.C U6.20
N$45: BRIGHT-POT.P2 R30.2
N$46: ACT-SW.P$6 R60.1
N$47: M-UP-SW.P$6 R61.1
N$48: C24.1 C25.1 C26.1 U8.5
N$49: M-DOWN-SW.P$6 R62.1
N$50: R26.2 R27.2 TP92.TP U6.22
N$51: C24.2 R32.2
N$52: R33.1 U8.1
N$53: C27.1 U8.7
N$54: P1.P2 TP87.TP U8.3
N$55: Q27.1 Q27.3 Q28.1 R63.2
N$56: Q26.1 Q28.3 R64.2 TP108.TP
N$59: U9.11
N$60: U9.12
N$67: U10.11
N$68: U10.12
PWM-OE: U9.15 U10.15 U$1.59
PWR1-SW: J1.P$3 U$1.50
PWR2-SW: J2.P$3 U$1.52
PWR-FB: R3.1 R4.1 U1.4
RAW-FILTER: C17.2 P1.P1 R25.2 TP85.TP
RAW-L: PAN-POT.P$1 R21.2 TP81.TP
RAW-OUT: C25.2 R34.2 TP86.TP U$1.54
RAW-R: PAN-POT.P$3 R20.2 TP82.TP
RESET: RST-SW.3 RST-SW.4 TP119.TP U$1.RST
SCLK: J3.P18 R2.1 TP2.TP U9.18 U10.18 U$1.SDA
SDA: J3.P17 R1.1 TP1.TP U9.19 U10.19 U$1.SCLK
VCC: A1.P$2 A2.P$2 C6.1 C7.1 C8.1 C9.1 C10.1 C11.1 C12.1 C18.1 C19.1 C20.1 C21.1 C22.1 C23.1 CONT-POT.P1 D4.A D5.A D6.A D7.A D8.A D9.A DN1.A1 DN1.A2 DN1.A3 DN1.A4 DN1.A5 DN1.A6 DN1.A7 DN1.A8 DN1.A9 DN1.A10 DS1.D2 DS1.D15 J3.P36 L1.P$2 Q26.2 Q28.2 R1.2 R2.2 R3.2 R19.2 TP3.TP TP107.TP U4.4 U5.4 U6.24 U7.5 U8.6 U9.20 U10.1 U10.20
VDD: C13.1 C14.1 C15.1 R6.1 R7.1 R8.1 R9.1 R10.1 R11.1 R12.1 R13.1 R28.NO TP109.TP U4.3 U4.5 U4.10 U4.12 U5.3 U5.5 U5.10 U5.12
XLR-IN: R17.2 TP77.TP U7.1